# Altium PCB PCB_Fonte_Chaveada_5V.PcbDoc
Units mm, origin at the board's own origin, x right, y up, seen from the top; angles counter-clockwise.
Board outline 30 x 11 mm, 2 copper layers (Top Layer, Bottom Layer); 16 components, 9 nets, 39 pads, 6 vias.
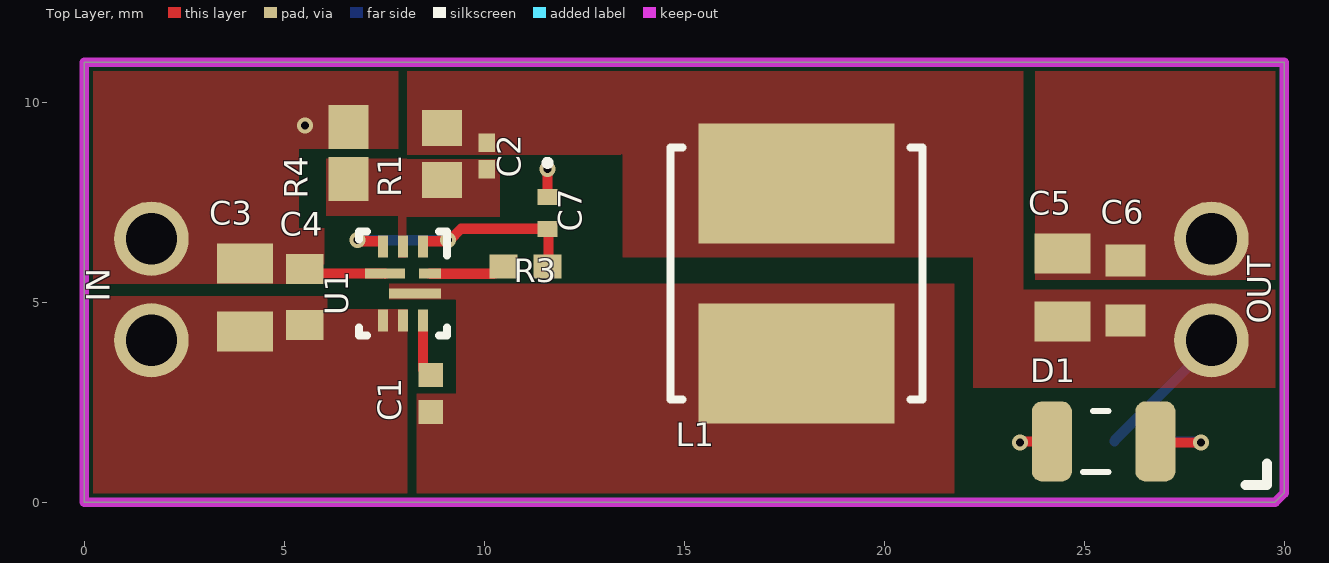
[diagram p0: Top Layer view]
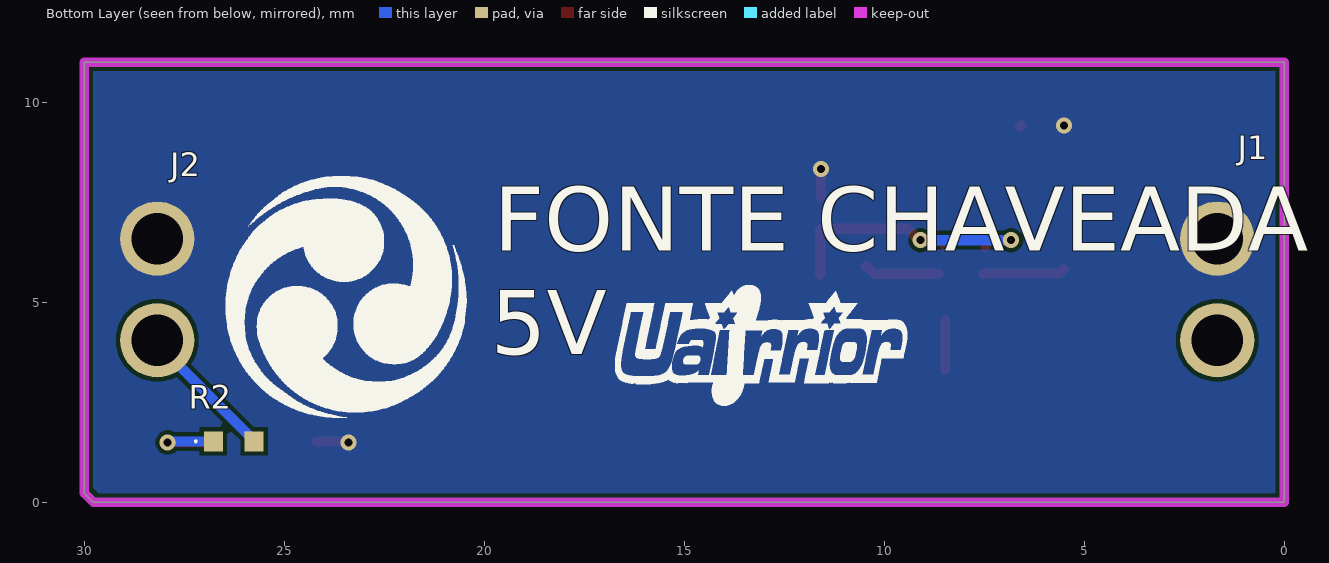
[diagram p1: Bottom Layer view, seen from below]

## Layer stack, top to bottom
Top Solder: solder mask 0.0102, Solder Resist, Dk 3.5
Top Layer: signal copper 0.0356
Dielectric 1: dielectric 0.32, FR-4, Dk 4.8
Bottom Layer: signal copper 0.0356
Bottom Solder: solder mask 0.0102, Solder Resist, Dk 3.5

## Board outline
0,0 29.769,0 30,0.231 30,11 0,11

## Design rules (kind name [scope] priority, off if disabled: settings)
Clearance [All] p1: gap=0.1 ignorepadtopadclearanceinfootprint=TRUE
PlaneConnect [All] p1: planeconnectstyle=Direct reliefexpansion=0.508 reliefentries=4 reliefconductorwidth=0.254 reliefairgap=0.254
PolygonConnect [All] p1: connectstyle=Direct reliefconductorwidth=0.254 reliefentries=4 polygonreliefangle="90 Angle" airgapwidth=0.254
RoutingVias [All] p1: holewidth=0.711 width=1.27 viastyle="Through Hole" minholewidth=0.711 minwidth=1.27 maxholewidth=0.711 maxwidth=1.27
SolderMaskExpansion [All] p1: expansion=0.102 istentingtop=FALSE
Width [All] p1: maxlimit=0.254 minlimit=0.254 preferedwidth=0.254
29 further rules are at their usual default settings.

## Components (designator, comment, footprint, x,y, rotation, side; value= is the part's Value field where it differs from the comment)
C1 "0.1uF" CAPC1005X55N 8.661,2.718 r90 top
C2 "33pF" C0201 10.058,8.661 r90 top
C3 "22 uF" C0805 13.812,-13.018 r270 top
C4 "0.1uF" CAPC1608X90N 5.512,5.131 r270 top
C5 "22uF" C0805 34.259,-12.762 r270 top
C6 "0.1 uF" C0603 -47.353,-181.916 r270 top
C7 "1uF" C1005 11.582,7.239 r270 top
D1 "Blue" DIODO_2-SMD-3215 25.476,1.524 r0 top
J1 "Male Header 2" "MALE HEADER 2" 1.678,4.051 r90 bottom
J2 "Male Header 2" "MALE HEADER 2" 28.178,4.051 r90 bottom
L1 "2.2 uH" 6045 17.805,5.715 r90 top
R1 "220kOhms" RESISTOR_0603 8.941,8.712 r90 top
R2 "150R" RESISTOR_0402 26.264,1.524 r180 bottom
R3 "100kOhms" RESC1005X40N 11.024,5.893 r180 top
R4 "30kOhms" RESC1608X55N 6.604,8.738 r270 top
U1 "TPS566231PRQFR" RQF0009A 433.037,487.1 r270 top

## Footprints (in the part's own frame and the unit in brackets; to place one, negate y for a bottom-side part, rotate by r counter-clockwise, add the part's x,y. Pads: shape width x height; smd on the part's side, far side on the other; paste and mask are expansions set on the pad)
6045 [mm] "Precision Wire Wound Inductor, 2-Leads, Body 6,00x6,00mm, IPC Medium Density"
  rect 3x4.9 smd: 1(-2.25,0) 2(2.25,0)
  silkscreen extent -3.15,-3.15 3.15,3.15, body extent -3.1,-3 3.1,3, height 4.6
C0201 [mm]
  rect 0.46x0.42 smd: 1(-0.33,0) 2(0.33,0)
  body extent -0.32,-0.17 0.32,0.17, height 0.33
C0603 [mm]
  rect 0.8x1 smd: 1(-187.961,73.388) 2(-186.461,73.388)
  body extent -188.06,72.92 -186.36,73.82, height 0.8
C0805 [mm]
  rect 1x1.4 smd: 1(-18.985,-9.799) 2(-17.285,-9.799)
  body extent -19.21,-10.47 -17.06,-9.12, height 0.9
C1005 [mm]
  rect 0.4x0.5 smd: 1(-0.4,0) 2(0.4,0)
  silkscreen extent -1.3,-0.05 -1.2,0.05, body extent -0.56,-0.25 0.56,0.25, height 0.65
CAPC1005X55N [mm]
  rect 0.6x0.62 smd: 1(-0.46,0) 2(0.46,0)
  body extent -0.5,-0.25 0.5,0.25, height 0.55
CAPC1608X90N [mm]
  rect 0.75x0.94 smd: 1(-0.7,0) 2(0.7,0)
  body extent -0.8,-0.4 0.8,0.4, height 0.9
DIODO_2-SMD-3215 [mm]
  rrect50% 1x2 smd: A(1.3,0) C(-1.288,-0.001)
  silkscreen extent -0.51,-0.76 0.13,0.76, body extent -1.61,-0.77 1.66,0.87, height 0.9
"MALE HEADER 2" [mm]
  round 1.86 hole 1.28: PIN1(0,0) PIN2(2.54,0)
  body extent -1.27,-1.27 3.81,1.27, height 8
RESC1005X40N [mm]
  rect 0.7x0.6 smd: 1(-0.55,0) 2(0.55,0)
  body extent -0.5,-0.25 0.5,0.25, height 0.4
RESC1608X55N [mm]
  rect 1.1x1 smd: 1(-0.65,0) 2(0.65,0)
  body extent -0.8,-0.4 0.8,0.4, height 0.55
RESISTOR_0402 [mm]
  rect 0.475x0.5 smd: 1(-0.512,0) 2(0.512,0)
  silkscreen extent -0.97,-0.03 -0.93,0.03, body extent -0.5,-0.25 0.5,0.25, height 0.35
RESISTOR_0603 [mm]
  rect 0.9x1 smd: 1(-0.65,0) 2(0.65,0)
  body extent -0.8,-0.4 0.8,0.4, height 0.55
RQF0009A [mm]
  rect 0.55x0.25 smd paste+0 mask+0.051: 1(480.71,-424.569) 2(480.71,-425.069) 3(480.71,-425.569) 5(482.56,-425.569) 6(482.56,-425.069) 7(482.56,-424.569)
  rect 0.25x1 smd paste+0 mask+0.051: 4(481.385,-425.519)
  rect 0.25x1.3 smd paste+0 mask+0.051: 8(481.885,-424.769)
  rect 0.25x0.55 smd paste+0 mask+0.051: 9(481.385,-424.394)
  silkscreen extent 480.33,-426.17 482.93,-423.97, body extent 480.63,-425.82 482.63,-424.32, height 1

## Part data
C1: library part GRM155R61C104KA88D, "CAP CER 0.1uF 16V X5R 0402", Manufacturer=Murata, Operating Temperature="-55°C ~ 85°C", Package / Case="0402 (1005 Metric)", Supplier Part Number 1=81-GRM155R61C104KA8D, Tolerance=10%, Voltage - Rated=16V, Category="Ceramic Capacitors", ComponentLink1Description=Datasheet, ComponentLink1URL=https://br.mouser.com/datasheet/2/281/1/GRM155R61C104KA88_01A-1983743.pdf, ComponentLink2Description="Mouser Link", ComponentLink2URL=https://br.mouser.com/ProductDetail/Murata-Electronics/GRM155R61C104KA88D?qs=%2Fha2pyFadugsr51Fgcs3VGJIvx6dQb2fpcJyrxDKYTBEoW5q5paGTQ%3D%3D, Dieletric=X5R, ESR=-, Library Control - Checked Footprint=Yes, Library Control - Checked Schematic=Yes, Library Control - Last Update="24/07/2021 11:05", Library Control - Person that Checked Footprint=Guilherme, Library Control - Person that Checked Schematic=Guilherme, Library Control - Person that did the Last Update Footprint=Guilherme, Library Control - Person that did the Last Update Schematic=Guilherme, Library Ref=Capacitor, Part Number=GRM155R61C104KA88D, Price="1 = 0,10, 10=0,024, 100=0,011 (USD)", Size / Dimension="1,0 L x 0,5 W x 0,5 H", Supplier 1=Mouser
C2: library part CGA1A2C0G1E330J030BA, "CAP CER 33pF 25V C0G (NP0) 0201", Manufacturer=TDK, Operating Temperature="-55°C ~ 125°C", Package / Case="0201 (0603 Metric)", Supplier Part Number 1=810-CGA1A2C0G1E330J, Tolerance=5%, Voltage - Rated=25V, Category="Ceramic Capacitors", ComponentLink1Description=Datasheet, ComponentLink1URL=https://product.tdk.com/system/files/dam/doc/product/capacitor/ceramic/mlcc/catalog/mlcc_automotive_general_en.pdf, ComponentLink2Description="Mouser Link", ComponentLink2URL=https://br.mouser.com/ProductDetail/TDK/CGA1A2C0G1E330J030BA?qs=%2Fha2pyFadujYI3MxcM4e87jCoYqxM0hkLZT6GI2mHBlvDM1kNVjG3riGd7BUgX8y, Dieletric="C0G (NP0)", ESR=-, Library Control - Checked Footprint=Yes, Library Control - Checked Schematic=Yes, Library Control - Last Update="06/09/2021 22:37", Library Control - Person that Checked Footprint=Guilherme, Library Control - Person that Checked Schematic=Guilherme, Library Control - Person that did the Last Update Footprint="Stéfany (Ster)", Library Control - Person that did the Last Update Schematic=Guilherme, Library Ref=Capacitor, Part Number=CGA1A2C0G1E330J030BA, Price="1 = 0,34, 10=0,082, 100=0,036 (USD)", Size / Dimension="0,6 L x 0,3 W x 0,3 H", Supplier 1=Mouser
C3: library part C2012X5R1V226M125AC, "CAP CER 22UF 35V X7R 0805", Manufacturer=TDK, Operating Temperature="-55C ~ +85C", Package / Case="0805 (2012 metric)", Supplier Part Number 1=810-C2012X5R1V226MAC, Tolerance=20%, Voltage - Rated=35V, Category="Ceramic Capacitor", ComponentLink1Description="Mouser Link", ComponentLink1URL=https://br.mouser.com/ProductDetail/TDK/C2012X5R1V226M125AC?qs=%2Fha2pyFadujDqt6GaOhNLRdQFkZZGmK3Zr0qXWQTG43%252BZCfduHGyTu2Pm2ksWbbx, ComponentLink2Description=Datasheet, ComponentLink2URL=https://product.tdk.com/system/files/dam/doc/product/capacitor/ceramic/mlcc/catalog/mlcc_commercial_general_en.pdf, Dieletric=X5R, ESR=-, Library Control - Last Update="11/07/21 - 12:10", Library Control - Person that did the Last Update Footprint=Pierre, Library Control - Person that did the Last Update Schematic=Pierre, Library Ref=Capacitor, Part Number=C2012X5R1V226M125AC, Price="1= 0,99, 10= 0,751, 100= 0,537 (USD)", Size / Dimension="1.25mm x 2mm x 1.25 mm (HxLxW)", Supplier 1=Mouser
C4: library part GRM188R72A104KA35D, "CAP CER 0.1uF 100V X7R 0603", Manufacturer=Murata, Operating Temperature="-55°C ~ 125°C", Package / Case="0603 (1608 Metric)", Supplier Part Number 1=81-GRM188R72A104KA35, Tolerance=10%, Voltage - Rated=100V, Category="Ceramic Capacitors", ComponentLink1Description=Datasheet, ComponentLink1URL=https://br.mouser.com/datasheet/2/281/1/GRM188R72A104KA35_01A-1985906.pdf, ComponentLink2Description="Mouser Link", ComponentLink2URL=https://br.mouser.com/ProductDetail/Murata-Electronics/GRM188R72A104KA35D?qs=%2Fha2pyFadujAJDtX6qcn4LVf2TIEcBlj4PhfxwA4tsZBUcArwGh4MA%3D%3D, Dieletric=X7R, ESR=-, Library Control - Checked Footprint=Yes, Library Control - Checked Schematic=Yes, Library Control - Last Update="24/07/2021 11:05", Library Control - Person that Checked Footprint=Guilherme, Library Control - Person that Checked Schematic=Guilherme, Library Control - Person that did the Last Update Footprint=Guilherme, Library Control - Person that did the Last Update Schematic=Guilherme, Library Ref=Capacitor, Part Number=GRM188R72A104KA35D, Price="1 = 0,28, 10=0,121, 100=0,102 (USD)", Size / Dimension="1,60 L x 0,80 W x 0,80 H", Supplier 1=Mouser
C5: library part LMK212BJ226MG-T, "CAP CER 22uF 10V X5R 0805", Manufacturer="Taiyo Yuden", Operating Temperature="-55°C ~ 85°C", Package / Case="0805 (2012 Metric)", Supplier Part Number 1=963-LMK212BJ226MG-T, Tolerance=20%, Voltage - Rated=10V, Category="Ceramic Capacitors", ComponentLink1Description=Datasheet, ComponentLink1URL=https://br.mouser.com/datasheet/2/396/mlcc02_e-1307760.pdf, ComponentLink2Description="Mouser Link", ComponentLink2URL=https://br.mouser.com/ProductDetail/Taiyo-Yuden/LMK212BJ226MG-T?qs=%2Fha2pyFaduhTWJqyA9yCTREf%2Fo8XKOh0QNvJbjdkP7PnwxAMlkivcQ%3D%3D, Dieletric=X5R, ESR=-, Library Control - Checked Footprint=Yes, Library Control - Checked Schematic=Yes, Library Control - Last Update="06/09/2021 23:23", Library Control - Person that Checked Footprint=Guilherme, Library Control - Person that Checked Schematic=Guilherme, Library Control - Person that did the Last Update Footprint="Stéfany (Ster)", Library Control - Person that did the Last Update Schematic=Guilherme, Library Ref=Capacitor, Part Number=LMK212BJ226MG-T, Price="1 = 0,40, 10=0,283, 100=0,17 (USD)", Size / Dimension="2,0 L x 1,25 W x 1,25 H", Supplier 1=Mouser
C6: library part GRM188R71E104KA01D, "CAP CER 0.1uF 25V X7R 0603", Manufacturer="Murata Electronics", Operating Temperature="-55 C ~ 125 C", Package / Case="0603 (1608 Metric)", Supplier Part Number 1=81-GRM39X104K25, Tolerance=10%, Voltage - Rated="25 VDC", Category="Ceramic Capacitors", ComponentLink1Description=Datasheet, ComponentLink1URL=https://br.mouser.com/datasheet/2/281/murata_03052018_GRM_Series_1-1310166.pdf, ComponentLink2Description="Mouser Link", ComponentLink2URL=https://br.mouser.com/ProductDetail/Murata-Electronics/GRM188R71E104KA01D?qs=%2Fha2pyFaduiZGTXBCPzk%2FmTbMtAE8bS6%252BO3gVgb8hKBi1xePxGtiOg%3D%3D, Dieletric=X7R, ESR="100 mΩ", Library Control - Checked Footprint=Yes, Library Control - Checked Schematic=Yes, Library Control - Last Update="28/06/2021 00:22", Library Control - Person that Checked Footprint=Nikaum, Library Control - Person that Checked Schematic=Nikaum, Library Control - Person that did the Last Update Footprint=Raquel, Library Control - Person that did the Last Update Schematic=Nikaum, Library Ref=Capacitor, Part Number=GRM188R71E104KA01D, Price=-, Size / Dimension="1,60 L x 0,80 W x 0,80 H", Supplier 1=Mouser
C7: library part C1005X6S1C105K050BC, "CAP CER 1uF 16V X6S 0402", Manufacturer=TDK, Operating Temperature="-55 C ~ 105 C", Package / Case="0402 (1005 metric)", Supplier Part Number 1=810-C1005X6S1C105K, Tolerance=10%, Voltage - Rated=16V, Category="Multilayer Ceramic Capacitors MLCC - SMD/SMT", ComponentLink1Description=Datasheet, ComponentLink1URL=https://product.tdk.com/system/files/dam/doc/product/capacitor/ceramic/mlcc/catalog/mlcc_commercial_general_en.pdf, ComponentLink2Description="Mouser Link", ComponentLink2URL=https://br.mouser.com/ProductDetail/TDK/C1005X6S1C105K050BC?qs=%2Fha2pyFaduiE58rMJsOYNOS1N4ksRTL9nFP2OEKa3WnBEcUBb%2FNGJayO9ViIzAba, Dieletric=X6S, Library Control - Checked Footprint=Yes, Library Control - Checked Schematic=Yes, Library Control - Last Project that Used=Fuijin-MK1, Library Control - Last Update="17/07/2021 14:33", Library Control - Person that Checked Footprint=Guilherme, Library Control - Person that Checked Schematic=Guilherme, Library Control - Person that did the Last Update Footprint=Guilherme, Library Control - Person that did the Last Update Schematic=Guilherme, Library Ref=Capacitor, Part Number=C1005X6S1C105K050BC, Price="1=0,13, 10=0.055, 100=0.043 (USD)", Size / Dimension="1,00 mm L x 0,50 mm W x 0,5 mm H", Supplier 1=Mouser
D1: library part EAST3215BA5, "LED 75mW BLUE 45MCD 3215", Current - Forward (If)="20 mA", Manufacturer="Everlight Electronics", Max Power Dissipation="75 mW", Operating Temperature="- 40 °C ~ 85 °C", Package / Case=3215, Reverse Voltage="5 V", Supplier Part Number 1=638-EAST3215BA5, Voltage - Forward (Vf)="3,30 V", Category="Standard LEDs - SMD", Color=Blue, ComponentLink1Description="Mouser Link", ComponentLink1URL=https://www.mouser.com/ProductDetail/Everlight/EAST3215BA5?qs=Cqqh%252BS766wnzp9nQVj5A4g==, ComponentLink2Description=Datasheet, ComponentLink2URL=https://www.mouser.com/datasheet/2/143/EAST3215BA5-1154292.pdf, Library Control - Checked Footprint=yes, Library Control - Checked Schematic=yes, Library Control - Last Update="13/06/2021 12:45", Library Control - Person that Checked Footprint=Lucas, Library Control - Person that Checked Schematic=Lucas, Library Control - Person that did the Last Update Footprint="Stéfany (Ster)", Library Control - Person that did the Last Update Schematic="Stéfany (Ster)", Library Ref=Diodo/Led, Luminous Intensity="45 mcd", Max Current Rating="20 mA", Part Number=EAST3215BA5, Price="1 = 0,3800, 10 = 0,2050, 100 = 0.1080 (USD)", Supplier 1=Mouser, Viewing Angle=130°, Wavelength="468 nm"
L1: library part VLS6045EX-2R2N, "IND FIXED 2.2uH 7.5A 0.019OHM", Current Rating (Amps)=7.5A, DC Resistance (DCR)=0.019, Frequency - Self Resonant=-, Inductance Frequency - Test=100kHz, Manufacturer=TDK, Operating Temperature="- 40C ~ 105C", Package / Case=SMD/SMT, Supplier Part Number 1=810-VLS6045EX-2R2N, Tolerance="30 %", Category="Fixed Inductors", ComponentLink1Description=Datasheet, ComponentLink1URL=https://product.tdk.com/system/files/dam/doc/product/inductor/inductor/smd/catalog/inductor_commercial_power_vls6045ex_en.pdf, ComponentLink2Description="Mouser Link", ComponentLink2URL=https://br.mouser.com/ProductDetail/?qs=oF%2FSscNnLpDwTZ5UbvivMw%3D%3D, Library Control - Checked Footprint=-, Library Control - Last Project that Used=-, Library Control - Last Update=10/11/21, Library Control - Person that Checked Footprint=-, Library Control - Person that Checked Schematic=-, Library Control - Person that did the Last Update Footprint=Marcos, Library Control - Person that did the Last Update Schematic=Marcos, Library Ref=Inductor, Material - Core=Ferrite, Part Number=VLS6045EX-2R2N, Price="1=0,50, 10=0,346, 100=0,312 1000 = 0,246 (USD)", Q @ Freq=-, Shielding=Shielded, Size / Dimension="6 mm x 6 mm x 4.5 mm", Supplier 1=Mouser, Type=Fixed
R1: library part RG1608P-224-B-T5, "RES SMD 220 kOHMS 0,1% 1/10W 0603", Manufacturer=Susumu, Operating Temperature="- 55°C ~ 155°C", Package / Case="0603 (1608 Metric)", Power Rating="100 mW (1/10 W)", Resistor Type=Fixo, Supplier Part Number 1=754-RG1608P-224-BT5, Temperature Coefficient="25 PPM / C", Tolerance="0,1 %", Voltage Rating="100 V", Category="Thick Film Resistors - SMD", ComponentLink1Description="Mouser Link", ComponentLink1URL=https://br.mouser.com/ProductDetail/Susumu/RG1608P-224-B-T5?qs=%2Fha2pyFadugGZ8qiVjKZw3%2FyFcS5dmvF9YguiNF8xC%252BJU8zG6Xddcw%3D%3D, ComponentLink2Description=Datasheet, ComponentLink2URL=https://br.mouser.com/datasheet/2/392/n_catalog_partition01_en-1140338.pdf, Library Control - Checked Footprint=Yes, Library Control - Checked Schematic=Yes, Library Control - Last Update="06/09/2021 23:26", Library Control - Person that Checked Footprint=Guilherme, Library Control - Person that Checked Schematic=Guilherme, Library Control - Person that did the Last Update Footprint="Stéfany (Ster)", Library Control - Person that did the Last Update Schematic=Guilherme, Library Ref=Resistor, Part Number=RG1608P-224-B-T5, Price="1=0,36, 10=0,261, 100=0,107(USD)", Size / Dimension="1,6 L x 0,8 W x 0,4 H", Supplier 1=Mouser
R2: library part CRCW0100150RFREL, "RES SMD 150 OHM 1% 1/32W 0402", Manufacturer=Vishay, Operating Temperature="- 55ºC ~ 125ºC", Package / Case=71-CRCW0100150RFREL, Power Rating="30 mW (1/32 W)", Resistor Type=Fixed, Temperature Coefficient="250 PPM / C", Tolerance="1 %", Voltage Rating="15 V", Category="Thick Film Resistors - SMD", ComponentLink1Description="Mouser Link", ComponentLink1URL=https://br.mouser.com/ProductDetail/Vishay-Dale/CRCW0100150RFREL?qs=sGAEpiMZZMtlubZbdhIBIMHZ5gvv1VGt%2FDJwZ3JI3CA%3D, ComponentLink2Description=Datasheet, ComponentLink2URL=https://br.mouser.com/datasheet/2/427/VISH_S_A0011831033_1-2572231.pdf, Library Control - Checked Footprint=Yes, Library Control - Checked Schematic=Yes, Library Control - Last Update="14/09/2021 14:39", Library Control - Person that Checked Footprint=Guilherme, Library Control - Person that Checked Schematic=Guilherme, Library Control - Person that did the Last Update Footprint=Guilherme, Library Control - Person that did the Last Update Schematic=Guilherme, Library Ref=Resistor, Part Number=CRCW0100150RFREL, Price="1=0,19, 10=0,084, 100=0,062 (USD)", Size / Dimension="0.4 mm L x  0.2 mm W x  0.13 mm H", Supplier 1=Mouser, Supplier Part Number 1=71-CRCW0100150RFREL
R3: library part CRCW0402100KFKED, "RES SMD 100 kOHMS 1% 1/16W 0402", Manufacturer=Vishay, Operating Temperature="- 55°C ~ 155°C", Package / Case="0402 (1005 Metric)", Power Rating="62,5 mW (1/16 W)", Resistor Type=Fixo, Supplier Part Number 1=71-CRCW0402-100K-E3, Temperature Coefficient="100 PPM / C", Tolerance="1 %", Voltage Rating="50 V", Category="Thick Film Resistors - SMD", ComponentLink1Description="Mouser Link", ComponentLink1URL=https://br.mouser.com/ProductDetail/Vishay-Dale/CRCW0402100KFKED?qs=OlqPY1CiralZGKRwQ4Glcg%3D%3D, ComponentLink2Description=Datasheet, ComponentLink2URL=https://br.mouser.com/datasheet/2/427/dcrcwe3-1762152.pdf, Library Control - Checked Footprint=Yes, Library Control - Checked Schematic=Yes, Library Control - Last Update="24/07/2021 11:34", Library Control - Person that Checked Footprint=Guilherme, Library Control - Person that Checked Schematic=Guilherme, Library Control - Person that did the Last Update Footprint=Guilherme, Library Control - Person that did the Last Update Schematic=Guilherme, Library Ref=Resistor, Part Number=CRCW0402100KFKED, Price="1=0,11, 10=0,04, 100=0,016(USD)", Size / Dimension="1,0 L x 0,5 W x 0,35 H", Supplier 1=Mouser
R4: library part RC0603FR-0730KL, "RES SMD 30 kOHMS 1% 1/10W 0603", Manufacturer=YAGEO, Operating Temperature="- 55°C ~ 155°C", Package / Case="0603 (1608 Metric)", Power Rating="100 mW (1/10 W)", Resistor Type=Fixo, Supplier Part Number 1=603-RC0603FR-0730KL, Temperature Coefficient="100 PPM / C", Tolerance="1 %", Voltage Rating="50 V", Category="Thick Film Resistors - SMD", ComponentLink1Description="Mouser Link", ComponentLink1URL=https://br.mouser.com/ProductDetail/YAGEO/RC0603FR-0730KL?qs=diQw95jMAeNFr44yr782FQ%3D%3D, ComponentLink2Description=Datasheet, ComponentLink2URL=https://br.mouser.com/datasheet/2/447/Yageo_03_18_2021_PYu_RC_Group_51_RoHS_L_11-2199992.pdf, Library Control - Checked Footprint=Yes, Library Control - Checked Schematic=Yes, Library Control - Last Update="24/07/2021 11:34", Library Control - Person that Checked Footprint=Guilherme, Library Control - Person that Checked Schematic=Guilherme, Library Control - Person that did the Last Update Footprint=Guilherme, Library Control - Person that did the Last Update Schematic=Guilherme, Library Ref=Resistor, Part Number=RC0603FR-0730KL, Price="1=0,10, 10=0,024, 100=0,01(USD)", Size / Dimension="1,6 L x 0,8 W x 0,45 H", Supplier 1=Mouser
U1: "IC REG SWITCHING 4A 0,6V TO 7V", Current - Operating Supply=75uA, Current - Output=6A, Frequency - Switching=600kHz, Manufacturer="Texas Instruments", Max Power Dissipation=-, Operating Temperature="-40°C ~ 125ºC", Package/ Case=VQFN-HR, Supplier Part Number 1=595-TPS566231PRQFR, Voltage - Input (Max)=18V, Voltage - Input (Min)=4.5V, Voltage - Output (Max)=7V, Voltage - Output (Min/Fixed)=600mV, Category="Switching Voltage Regulator", ComponentLink1Description=Datasheet, ComponentLink1URL=https://www.ti.com/lit/ds/symlink/tps566231.pdf?ts=1627121525087, ComponentLink2Description="Mouser Link", ComponentLink2URL=https://br.mouser.com/ProductDetail/Texas-Instruments/TPS566231PRQFR?qs=%2Fha2pyFaduin4%252BaGmPtS5cEip%2FV5xNoRI9ELwGck3HsUjgtKYNm%2FDQ%3D%3D, Library Control - Checked Footprint=Yes, Library Control - Checked Schematic=Yes, Library Control - Last Update=24/07/21, Library Control - Person that Checked Footprint=Guilherme, Library Control - Person that Checked Schematic=Guilherme, Library Control - Person that did the Last Update Footprint=Marques, Library Control - Person that did the Last Update Schematic=Marques, Library Ref="Voltage Regulator", Number of Regulators=1, Output Type=Regulated, Part Number=TPS566231PRQFR, Price="1=2,92, 10=2,63, 100=2,15 (USD)", Supplier 1=MOUSER, Voltage - Dropout (Max)=-
J1 J2: Library Control - Person that did the Last Update Schematic=Marcos, Library Control - Persont that did the Last Update Footprint=Marcos, Library Ref=Header, Number of Contacts=2, System=Connector

## Via types
v1: diameter 0.4, hole 0.2, Top Layer to Bottom Layer, tented both sides, 6 vias

## Nets (pads, with @x,y where several pads share a name; then routed paths per layer and width w, separated by ;. In a path a pad name is that pad's centre, name@x,y a point inside that pad or via, vN(x,y) a via of type N, cw(c..) or ccw(c..) an arc to the next point about the centre after c; other vN are vias at no path point)
5V: C2.2 C5.2 C6.2 J2.PIN1 L1.2 R1.2 R2.2 | length 3.5
  Bottom Layer w0.254: R2.2 25.752,1.536 28.178,3.962 J2.PIN1
12V: C3.2 C4.2 J1.PIN1 U1.5 U1.6
GND: C3.1 C4.1 C5.1 C6.1 C7.1 D1.C J1.PIN2 J2.PIN2 R4.1 U1.4 | length 3.6
  Top Layer w0.254: C4.1 5.626,5.717 7.516,5.717 U1.4 ; R4.1@6.568,9.423 R4.1 ; C7.1 v1(11.582,8.331) ; v1(23.393,1.499) 23.417,1.523 D1.C
  other v1: 5.512,9.423
NetC1_1: C1.1 L1.1 U1.8
NetC1_2: C1.2 U1.7 | length 1.2
  Top Layer w0.254: U1.7 8.47,4.538 8.47,3.318 C1.2@8.484,3.305
NetC2_1: C2.1 R1.1 R4.2 U1.2
NetC7_2: C7.2 R3.1 U1.1 U1.3 | length 7.6
  Top Layer w0.254: v1(6.833,6.553) 6.861,6.525 7.466,6.525 7.468,6.523 U1.3 ; U1.1 8.468,6.523 8.47,6.525 9.065,6.525 v1(9.093,6.553) 9.133,6.553 9.419,6.839 C7.2 11.603,6.818 11.603,5.711 R3.1@11.624,5.69
  Bottom Layer w0.254: v1(6.833,6.553) v1(9.093,6.553)
NetD1_A: D1.A R2.1 | length 2.3
  Top Layer w0.254: D1.A 26.802,1.499 v1(27.915,1.499)
  Bottom Layer w0.254: R2.1 27.889,1.524 v1(27.915,1.499)
NetR3_2: R3.2 U1.9 | length 1.9
  Top Layer w0.254: U1.9 10.246,5.715 10.424,5.893 R3.2

## Polygon pours and split planes (outlines as drawn)
5V on Top Layer "5V_L01_P004" (solid, pour order 4): 29.845,2.87 22.225,2.87 22.225,6.121 13.462,6.121 13.462,8.687 13.437,8.712 13.411,8.687 8.077,8.687 8.077,10.871 23.47,10.871 23.47,6.35 23.47,5.309 29.845,5.309
NetC1_1 on Top Layer "NETC1_1_L01_P000" (solid, pour order 0): 7.62,5.46 7.62,5.08 9.271,5.08 9.296,5.055 9.296,2.718 8.306,2.718 8.306,0.127 21.742,0.127 21.742,5.46
GND on Top Layer "GND_L01_P008" (solid, pour order 8): 7.849,8.839 7.849,10.871 0.127,10.871 0.127,5.486 0.102,5.461 5.969,5.461 5.994,5.486 5.994,6.858 5.359,6.858 5.359,8.839
12V on Top Layer "12V_L01_P007" (solid, pour order 7): 8.077,4.826 8.077,0.127 0.127,0.127 0.127,5.156 6.071,5.156 6.071,4.826
GND on Top Layer "GND_L01_P006" (solid, pour order 6): 23.774,5.563 23.774,10.846 29.845,10.846 29.845,5.563
NetC2_1 on Top Layer "NETC2_1_L01_P005" (solid, pour order 5): 7.849,6.121 7.849,7.163 6.045,7.163 6.045,8.585 10.389,8.585 10.389,7.137 8.052,7.137 8.052,6.121
GND on Bottom Layer "GND_L02_P010" (solid, pour order 10): 0.127,10.897 0.127,0.127 29.54,0.127 29.82,0.406 29.82,10.846

## Keep-outs
Keep-Out Layer:
  the board outline again, w0.234

## Silkscreen, mask and mechanical layers (free items; w line width, h text height)
Top Overlay:
  lines w0.254: 29.032,0.432 29.566,0.432 29.566,0.965
  text "IN" at 0.838,5.015 h1 r90
  text "OUT" at 29.859,4.47 h1 r90
Bottom Overlay:
  drawing of 9 lines, arcs and shapes, not listed
  text "FONTE CHAVEADA" at 19.764,5.764 h2.75
  text "5V" at 19.837,3.178 h2.75
BoardOutLine:
  the board outline again, w0.254